# Altium PCB MSXIV_DC-DC_Converter.PcbDoc (part 1 of 2)
Units mm, origin at the board's own origin, x right, y up, seen from the top; angles counter-clockwise.
Board outline 196.53 x 66.51 mm, 2 copper layers (Top Layer, Bottom Layer); 69 components, 35 nets, 204 pads, 127 vias.
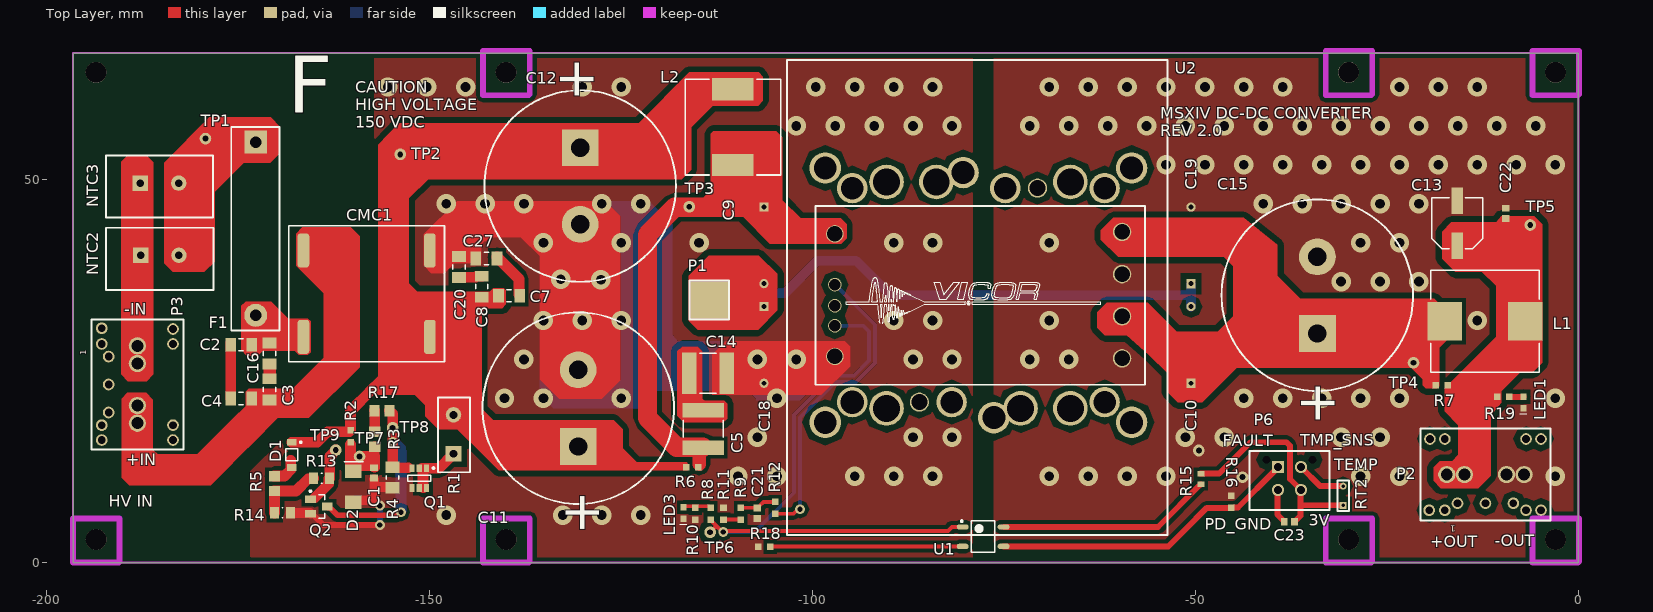
[diagram p0: Top Layer view]
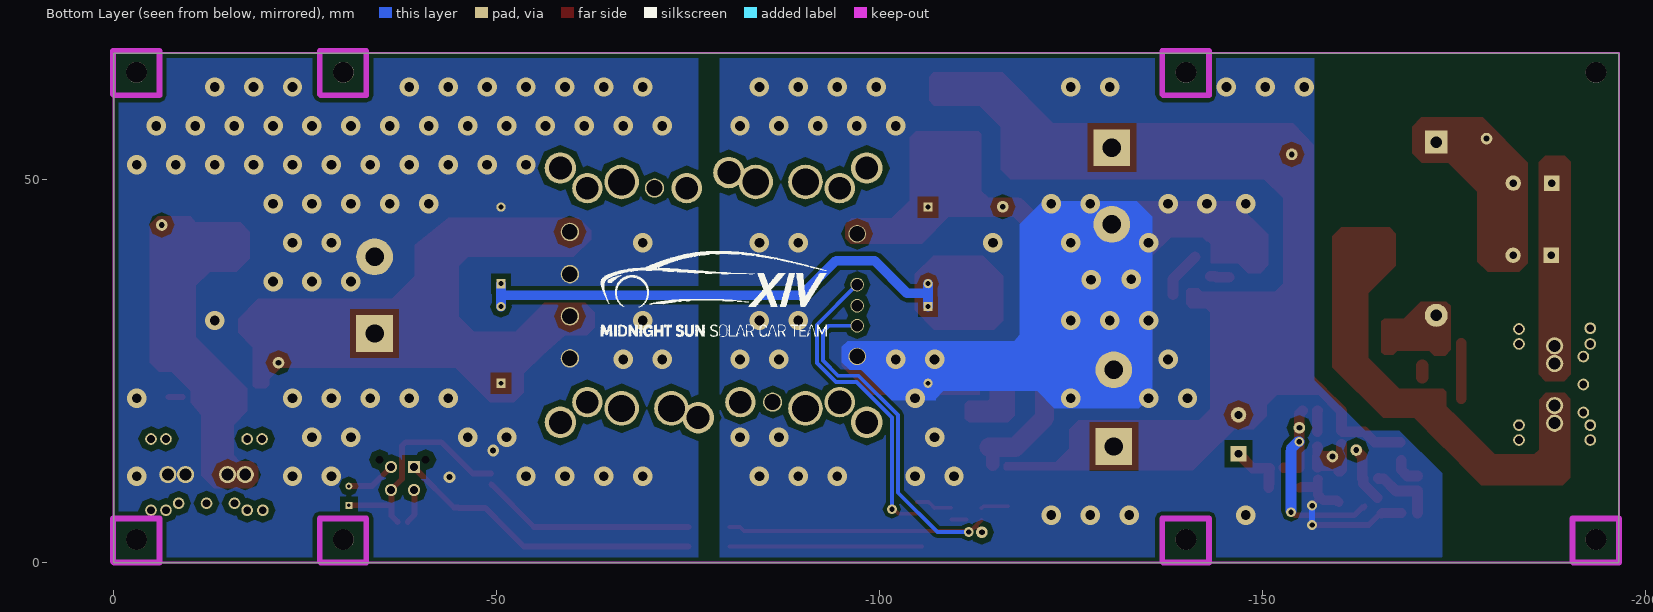
[diagram p1: Bottom Layer view, seen from below]
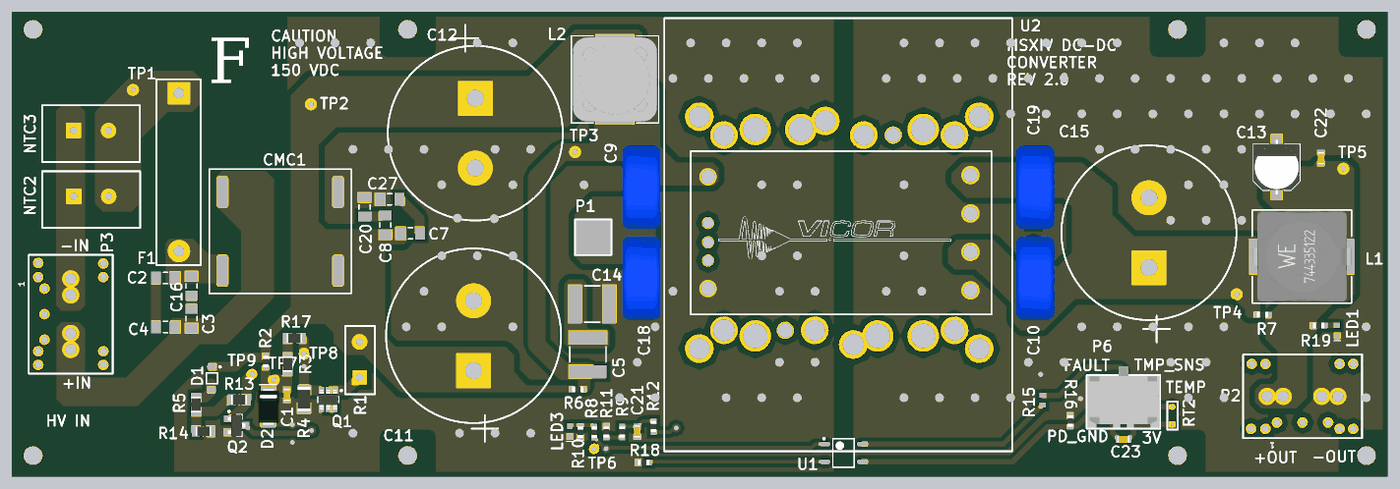
[diagram p2: 3D render of the assembled board from above, using the file's embedded part models]

## Layer stack, top to bottom
Top Solder: solder mask 0.0102, Solder Resist, Dk 3.5
Top Layer: signal copper 0.0356
Dielectric 1: dielectric 0.32, FR-4, Dk 4.8
Bottom Layer: signal copper 0.0356
Bottom Solder: solder mask 0.0102, Solder Resist, Dk 3.5

## Board outline
-196.53,0 -196.53,66.508 0,66.508 0,0

## Design rules (kind name [scope] priority, off if disabled: settings)
Clearance "Stitching HV_GND" [IsStitchingVia and InNet('HV_GND') vs (IsVia and (Not IsStitchingVia)) Or IsPad] p1: gap=0.127 ignorepadtopadclearanceinfootprint=FALSE
Clearance [All] p2: gap=0.254 ignorepadtopadclearanceinfootprint=FALSE except(0: Arc-Hole Track-Hole SMDPad-SMDPad SMDPad-THPad SMDPad-Hole THPad-Hole Via-Hole Fill-Hole Poly-Hole Region-Hole Text-Hole; 0.508: Arc-Fill Arc-Poly Arc-Region Track-Fill Track-Poly Track-Region SMDPad-Fill SMDPad-Poly SMDPad-Region Via-Fill Via-Poly Via-Region; 0.762: THPad-Fill THPad-Poly THPad-Region Fill-Fill Fill-Poly Fill-Region Poly-Poly Poly-Region Region-Region)
Height [All] p1: minheight=0 maxheight=50 prefheight=12.7
PolygonConnect [All] p1: connectstyle=Direct reliefconductorwidth=0.254 reliefentries=4 polygonreliefangle="90 Angle" airgapwidth=0.254
RoutingVias [All] p1: holewidth=0.711 width=1.27 viastyle="Through Hole" minholewidth=0.711 minwidth=1.27 maxholewidth=0.711 maxwidth=1.27
SolderMaskExpansion [All] p1: expansion=0.102 istentingtop=FALSE
Width [All] p1: maxlimit=2.54 minlimit=0.254 preferedwidth=0.254 minimp=50.000000 maximp=50.000000 favimp=50.000000
29 further rules are at their usual default settings.

## Classes and differential pairs
component class MSXIV_Discharge_Circuit: C1 D1 D2 Q1 Q2 R1 R2 R3 R4 R5 R13 R14 R17 TP7 TP8 TP9
net class HV: BULK_CAP_NEG BULK_CAP_POS HV_POS NetC5_1
net class 20A: GND NetC10_1 NetC13_1
net class 5A: BULK_CAP_NEG BULK_CAP_POS HV_POS NetC5_1
component class MSXIV_DC-DC_Converter: C2 C3 C4 C5 C7 C8 C9 C10 C11 C12 C13 C14 C15 C16 C18 C19 C20 C21 C22 C23 C27 CMC1 F1 F2 L1 L2 LED1 LED3 NTC2 NTC3 P1 P2 P3 P6 R6 R7 R8 R9 R10 R11 R12 R15 R16 R18 R19 RT2 TP1 TP2 TP3 TP4 TP5 TP6 U1 U2

## Components (designator, comment, footprint, x,y, rotation, side; value= is the part's Value field where it differs from the comment)
C1 "CAP CER 1UF 50V 10% X7R 0603" "CAP, 0603" -157.251,11.695 r270 top value=1µF
C2 "CAP CER 0.1UF 200V X7R 1206" "CAP, 1206" -174.587,28.427 r180 top
C3 "CAP CER 0.1UF 200V X7R 1206" "CAP, 1206" -170.876,22.61 r270 top
C4 "CAP CER 0.1UF 200V X7R 1206" "CAP, 1206" -174.584,21.417 r0 top
C5 "CAP CER 1UF 200V X7R 2220" "CAP, 2220" -114.249,17.45 r90 top
C7 "CAP CER 0.1UF 200V X7R 1206" "CAP, 1206" -139.608,34.828 r0 top
C8 "CAP CER 0.1UF 200V X7R 1206" "CAP, 1206" -143.19,36.018 r90 top
C9 "CAP CER 4700PF 400VAC Y5V RADIAL" "CAP 4700PF 400VAC Y5V RADIAL" -106.333,46.408 r270 top value=4700pF
C10 "CAP CER 4700PF 400VAC Y5V RADIAL" "CAP 4700PF 400VAC Y5V RADIAL" -50.583,23.408 r90 top value=4700pF
C11 "CAP ALUM 1000UF 20% 200V SNAP" "CAP ALUM 1000uF 200V" -130.583,15.158 r90 top locked
C12 "CAP ALUM 1000UF 20% 200V SNAP" "CAP ALUM 1000uF 200V" -130.333,54.158 r270 top locked
C13 "EEE-1HA4R7NP" "CAP ALUM 6.3MM RADIAL SMD" -15.824,44.298 r90 top
C14 "CAP CER 1UF 200V X7R 2220" "CAP, 2220" -113.633,24.708 r0 top
C15 "CAP ALUM 15000UF 20% 25V SNAP" "CAP ALUM 1000uF 200V" -34.083,29.908 r90 top
C16 "CAP CER 0.1UF 200V X7R 1206" "CAP, 1206" -170.876,27.284 r270 top
C18 "CAP CER 4700PF 400VAC Y5V RADIAL" "CAP 4700PF 400VAC Y5V RADIAL" -106.333,33.408 r270 top value=4700pF
C19 "CAP CER 4700PF 400VAC Y5V RADIAL" "CAP 4700PF 400VAC Y5V RADIAL" -50.583,36.408 r90 top value=4700pF
C20 "CAP CER 0.1UF 200V X7R 1206" "CAP, 1206" -146.152,38.583 r90 top
C21 "CAP CER 0.1UF 50V 10% X7R 0603" "CAP, 0603" -107.188,6.452 r270 top
C22 "CAP CER 10uF 25V 20% X5R 0603" "CAP, 0603" -9.5,45.578 r90 top
C23 "CAP CER 0.1UF 50V 10% X7R 0603" "CAP, 0603" -37.729,5.313 r180 top
C27 "CAP CER 0.1UF 200V X7R 1206" "CAP, 1206" -142.57,39.7 r180 top
CMC1 "CM Choke" "LCCI 50 Common mode choke" -158.201,35.107 r0 top
D1 "DIODE ZENER 68V 500MW SOD123" ONSC-SOD-123-2-425-04_V -167.97,14.072 r270 top
D2 "DIODE ZENER 16V 5W DO-214AA (SMB)_1" "DO-214AA Diode" -159.944,7.874 r90 top
F1 "FUSE CERAMIC 5A 600VAC/500VDC" 0ADKC5000-BE-Footprint-1 -172.898,32.741 r0 top
L1 "FIXED IND 820NH 27A 0.9 MOHM SMD" WE-HCI-1365 -12.21,31.496 r0 top
L2 "FIXED IND 22UH 5.3A 28 MOHM SMD" WE-PD-XXL -110.388,56.845 r270 top
LED1 "LED GREEN CLEAR 2V 0603" LED_0603 -7.188,21.59 r270 top
LED3 "LED RED CLEAR 2V 0603" LED_0603 -116.85,7.165 r270 top
NTC2 "ICL 80 OHM 20% 1.6A" ICL_THROUGH_HOLE_B57236S0800M051 -187.716,40.111 r0 top
NTC3 "ICL 80 OHM 20% 1.6A" ICL_THROUGH_HOLE_B57236S0800M051 -187.741,49.534 r0 top
P1 "5mm PAD" "5MM PAD" -113.483,34.208 r0 top
P2 "CONN HEADER TE  ELCON Mini 2POS PCB" "CONN HEADER TE  ELCON Mini 2POS PCB-Footprint-1" -12.141,11.481 r270 top
P3 "CONN HEADER TE  ELCON Mini 2POS PCB" "CONN HEADER TE  ELCON Mini 2POS PCB-Footprint-1" -188.138,23.241 r180 top
P6 "CONN 4POS MICRO-FIT 3mm" "CONN 4POS MICROFIT (2x2)" -36.227,9.476 r0 top
Q1 "MOSFET N-CH 200V 1.1A SSOT-6" FAIR-SOT23-6_V -151.333,11.024 r270 top
Q2 "MMBT3904" FAIR-SOT23-3_V -164.44,7.315 r0 top
R1 "RES 1K OHM 15W 1% TO126" MP915-1.00K-1%-Footprint-1 -146.863,14.199 r90 top
R2 "RES 1M OHM 1% 1/10W 0603" "RES, 0603" -160.299,16.472 r270 top
R3 "Resistor 100k +/-1% 0805 125 mW" RESC2013X70X40ML20T20 -157.15,16.094 r270 top value=100k
R4 "RES SMD 470K OHM 0.1% 1/4W 1206" "RES 1206" -154.813,11.1 r270 top value=470k
R5 "Resistor 100k +/-1% 0805 125 mW" RESC2013X70X40ML20T20 -170.256,10.312 r90 top value=100k
R6 "RES 1 OHM 5% 1/10W 0603" "RES, 0603" -115.685,12.471 r0 top
R7 "RES 1 OHM 5% 1/10W 0603" "RES, 0603" -17.833,23.158 r0 top
R8 "RES 330 OHM 1% 1/10W 0603" "RES, 0603" -113.311,6.352 r90 top
R9 "RES 10K OHM 1% 1/10W 0603" "RES, 0603" -109.366,6.377 r270 top
R10 "RES 54.9K OHM 1% 1/10W 0603" "RES, 0603" -115.311,6.352 r270 top
R11 "RES 15.6K OHM 0.1% 1/10W 0402" "RES, 0603" -111.616,6.377 r270 top
R12 "RES 0.0 OHM 1/4W 0603" "RES, 0603" -104.866,7.152 r270 top
R13 "Resistor 10k +/-1% 0805 125 mW" RESC2013X50X35ML15T15 -164.084,10.998 r180 top value=10k
R14 "Resistor 10k +/-1% 0805 125 mW" RESC2013X50X35ML15T15 -169.181,6.477 r180 top value=10k
R15 "RES SMD 100 OHM 1% 1/10W 0603" RESC1608X55X25NL10T15 -49.301,10.908 r90 top
R16 "RES 1K OHM 5% 1/10W 0603" "RES, 0603" -45.339,7.937 r90 top
R17 "Resistor 100k +/-1% 0805 125 mW" RESC2013X70X40ML20T20 -156.194,19.812 r180 top value=100k
R18 "RES 330 OHM 1% 1/10W 0603" "RES, 0603" -106.299,2.032 r180 top
R19 "RES 4.7K OHM 1% 1/10W 0603" "RES, 0603" -9.817,21.615 r0 top
RT2 "10K NTC" "NTC THERMISTOR BEAD" -30.718,7.472 r90 top
TP1 "Thru Test Point" "Thru Test Point" -179.248,55.347 r0 top
TP2 "Thru Test Point" "Thru Test Point" -153.822,53.289 r90 top
TP3 "Thru Test Point" "Thru Test Point" -116.078,46.457 r90 top
TP4 "Thru Test Point" "Thru Test Point" -21.539,26.086 r90 top
TP5 "Thru Test Point" "Thru Test Point" -6.299,44.069 r90 top
TP6 "Thru Test Point" "Thru Test Point" -113.36,3.962 r90 top
TP7 "Thru Test Point" "Thru Test Point" -159.131,13.843 r90 top
TP8 "Thru Test Point" "Thru Test Point" -154.813,17.588 r90 top
TP9 "Thru Test Point" "Thru Test Point" -162.23,14.681 r90 top
U1 "OPTOISOLATOR 1.5KV TRANS 4SMD" SOIC127P610X228-4N -77.724,3.378 r0 top
U2 "DCDC VICOR CONVERTER 15V 240W - DCM3623TA5N17B4T70" "IC, DCDC CONVERTER DCM3623TA5N17B4T70" -78.333,34.908 r0 top locked

## Footprints (in the part's own frame and the unit in brackets; to place one, negate y for a bottom-side part, rotate by r counter-clockwise, add the part's x,y. Pads: shape width x height; smd on the part's side, far side on the other; paste and mask are expansions set on the pad)
0ADKC5000-BE-Footprint-1 [mm]
  rect 3x3 hole 1.5: 1(0.217,22.135)
  round 3 hole 1.5: 2(0.217,-0.465)
  silkscreen extent -2.98,-2.46 3.32,24.14, body extent -2.98,-2.46 3.32,24.14, height 8.13
"5MM PAD" [mm] "5mmx5mm Pad for EMI GROUND"
  rect 5x5 smd: 1(0,0)
  silkscreen extent -2.6,-2.5 2.6,2.6
"CAP 4700PF 400VAC Y5V RADIAL" [mm] "4700pF ±20% 400VAC Ceramic Capacitor Y5V (F) Radial, Disc"
  rect 1.2x1.2 hole 0.65: 1(0,0)
  round 1.2 hole 0.65: 2(10,0)
  body extent -1,-3 11,2.5, height 16
"CAP ALUM 6.3MM RADIAL SMD" [mm] "Aluminum Electrolytic Capacitor, Body 6.50x6.50x5.50mm, IPC Low Density"
  rect 3.45x1.55 smd: 1(-2.95,0) 2(2.95,0)
  silkscreen extent -3.3,-3.3 3.3,3.3, body extent -3.9,-3.3 3.9,3.3, height 5.5
"CAP ALUM 1000uF 200V" [mm] "Footprint for 1000µF 200V Aluminum Electrolytic Capacitors Radial, Can - Snap-In 199mOhm @ 120Hz 3000 Hrs @ 85°C"
  rect 4.8x4.8 hole 2.4: 1(0,0)
  round 4.8 hole 2.4: 2(10,0)
  silkscreen extent -7.5,-12.5 17.5,12.5, body extent -8,-12.99 18,13, height 45
"CAP, 0603" [mm] "Chip Capacitor, 2-Leads, Body 1.60x0.81mm, IPC Medium Density"
  rect 0.9x1 smd mask+0.076: 1(-0.675,0) 2(0.675,0)
  body extent -0.87,-0.48 0.87,0.48, height 0.9
"CAP, 1206" [mm] "Chip Capacitor, 2-Leads, Body 3.20x1.60mm, IPC Medium Density"
  rect 1.4x1.8 smd: 1(-1.375,0) 2(1.375,0)
  silkscreen extent -0.3,-0.8 0.3,0.8, body extent -1.68,-0.87 1.67,0.87, height 1.8
"CAP, 2220" [mm] "Chip Capacitor, 2-Leads, Body 5.70x5.00mm, IPC Medium Density"
  rect 1.9x5.4 smd: 1(-2.45,0) 2(2.45,0)
  silkscreen extent -1.1,-2.6 1.1,2.6, body extent -3.05,-2.7 3.05,2.7, height 2.3
"CONN 4POS MICROFIT (2x2)" [mm]
  round 1.6 hole 1.02: 1(0,0) 2(-3,0) 3(0,3)
  rect 1.6x1.6 hole 1.02: 4(-3,3)
  round 0 hole 1.02: ""(-4.5,3.94) ""(1.5,3.94)
  silkscreen extent -6.75,-2.63 3.75,5.06, body extent -6.57,-2.47 3.57,6.29, height 9.91
"CONN HEADER TE  ELCON Mini 2POS PCB-Footprint-1" [mm]
  round 1.524 hole 1: 0(-4.65,7.25) 0(-4.65,5.3) 0(-4.65,-5.3) 0(-4.65,-7.25) 0(3.75,3.65) 0(3.75,0) 0(3.75,-3.65) 0(4.65,7.25) 0(4.65,5.3) 0(4.65,-5.3) 0(4.65,-7.35)
  round 2.25 hole 1.56: 1(0,-2.75) 1(0,-5.05) 2(0,5.05) 2(0,2.75)
  silkscreen extent -6,-8.5 6,8.5
"DO-214AA Diode" [mil] "Zener Diode 16V 5W SMBJ5353B-TP"
  rect 70x85 smd: 1(0,0) 2(160,0)
  silkscreen extent 209,-50 209,47, body extent -21,-60 187,55, height 95
FAIR-SOT23-3_V [mm] "SOT23, 3-Leads, Body 3.12x1.5mm, Pitch 0.95mm"
  rect 1.4x1 smd: 1(-1.1,0.95) 2(-1.1,-0.95) 3(1.1,0)
  silkscreen extent -1.22,-1.55 0.75,2.12, body extent -1.35,-1.56 1.35,1.56, height 1.2
FAIR-SOT23-6_V [mm] "SOT23, 6-Leads, Body 2.9x1.6mm, Pitch 0.95mm"
  rect 1x0.7 smd: 1(-1.3,0.95) 2(-1.3,0) 3(-1.3,-0.95) 4(1.3,-0.95) 5(1.3,0) 6(1.3,0.95)
  silkscreen extent -1.42,-1.5 0.4,1.98, body extent -1.4,-1.45 1.4,1.45, height 1.45
"IC, DCDC CONVERTER DCM3623TA5N17B4T70" [mm]
  round 2.28 hole 2.03: A1(-18.75,8) E1(-18.75,-8)
  round 2.41 hole 2.03: A'2(18.75,8.25) B'2(18.75,2.75) C'2(18.75,-2.75) D'2(18.75,-8.25)
  round 1.77 hole 1.52: B1(-18.75,1.38) C1(-18.75,-1.38) D1(-18.75,-4)
  round 4.1 hole 3: ""(-20,-16.6) ""(-20,16.6) ""(-2,16) ""(2,-16) ""(20,-16.6) ""(20,16.6)
  round 2.5 hole 3.1 unplated: ""(-16.47,-13.97)
  round 3.97 hole 2.95: ""(-16.47,-13.97) ""(-16.47,13.97) ""(-3.5,-13.97) ""(3.5,13.97) ""(16.47,-13.97) ""(16.47,13.97)
  round 4.52 hole 3.5: ""(-12,-14.78) ""(-12,14.78) ""(-12,14.78) ""(-5.5,14.78) ""(5.5,-14.78) ""(12,-14.78) ""(12,14.78)
  round 2.5 hole 2.1: ""(-7.71,-13.97) ""(7.71,13.97)
  silkscreen extent -25,-31.3 24.7,30.7, body extent -21.25,-11.7 21.75,11.64, height 8
ICL_THROUGH_HOLE_B57236S0800M051 [mm]
  rect 2x2 hole 1: 1(0,0)
  round 2 hole 1: 2(5,0)
  silkscreen extent -4.5,-4.5 9.5,3.6
"LCCI 50 Common mode choke" [mil] "5.6A CMC 18mm x20mm x 10mm"
  rrect50% 60x175 smd: 1(-325,-222) 2(325,-222) 3(-325,222) 4(325,222)
  silkscreen extent -400,-350 400,350, body extent -400,-350 400,350, height 390
LED_0603 [mm]
  rect 0.8x0.8 smd: 1(-0.05,0.01) 2(1.45,0.01)
  silkscreen extent 2.13,-0.46 2.13,0.45, body extent -0.09,-0.39 1.51,0.41, height 0.8
MP915-1.00K-1%-Footprint-1 [mil]
  rect 80x80 hole 40: 1(0,0)
  round 80 hole 40: 2(200,0)
  silkscreen extent -95,-85 290,80, body extent -95,-85 290,80, height 800
"NTC THERMISTOR BEAD" [mm] "NTC Thermistor 10k Bead"
  rect 0.9x0.9 hole 0.45: 1(0,0)
  round 0.9 hole 0.45: 2(2.5,0)
  silkscreen extent -0.75,-0.75 3.25,0.75
ONSC-SOD-123-2-425-04_V [mm] "SOD, 2-Leads, Body 2.69x1.6mm"
  rect 0.91x1.22 smd: 1(-1.635,0) 2(1.635,0)
  silkscreen extent -1.76,-0.8 0.78,1.29, body extent -1.35,-0.8 1.35,0.8, height 1.35
"RES 1206" [mm] "Chip Resistor, 2-Leads, Body 3.20x1.60mm, IPC Medium Density"
  rect 1.5x1.85 smd: 1(-1.325,0) 2(1.325,0)
  silkscreen extent -0.2,-0.82 0.2,0.82, body extent -1.73,-0.92 1.73,0.92, height 0.64
"RES, 0603" [mm] "Chip Resistor, 2-Leads, Body 1.60x0.80mm, IPC Medium Density"
  rect 0.85x0.85 smd: 1(-0.775,0) 2(0.775,0)
  body extent -0.8,-0.4 0.8,0.4, height 0.55
RESC1608X55X25NL10T15 [mm] "Chip Resistor, 2-Leads, Body 1.70x0.90mm, IPC Medium Density"
  rect 0.7x0.9 smd: 1(-0.7,0) 2(0.7,0)
  body extent -0.85,-0.45 0.85,0.45, height 0.55
RESC2013X50X35ML15T15 [mm] "Chip Resistor, 2-Leads, Body 2.2x1.4mm, IPC Low Density"
  rect 1.2x1.5 smd: 1(-1.05,0) 2(1.05,0)
  silkscreen extent -0.05,-0.65 0.05,0.65, body extent -1.1,-0.7 1.1,0.7, height 0.5
RESC2013X70X40ML20T20 [mm] "Chip Resistor, 2-Leads, Body 2.2x1.35mm, IPC Low Density"
  rect 1.35x1.45 smd: 1(-0.975,0) 2(0.975,0)
  body extent -1.1,-0.67 1.1,0.67, height 0.7
SOIC127P610X228-4N [mm] "SOIC, 4-Leads, Body 4.08x3.81mm, Pitch 1.27mm, IPC Medium Density"
  oval 1.55x0.7 smd: 1(-2.667,1.27) 2(-2.667,-1.27) 3(2.667,-1.27) 4(2.667,1.27)
  silkscreen extent -2.92,-2.05 1.53,2.16, body extent -1.9,-2.05 1.9,2.05, height 2.28
"Thru Test Point" [mil]
  round 60 hole 30: TH_TP(0,0)
WE-HCI-1365 [mm] "Inductor, 2-Leads, Body 13.2 x 12.8 mm"
  rect 4.5x5 smd: 1(-5.25,0) 2(5.25,0)
  silkscreen extent -7.1,-6.65 7.1,6.65, body extent -7.1,-6.4 7.1,6.4, height 6.49
WE-PD-XXL [mm] "SMD Inductor, 2-Leads, Body 12.0 x 12.0 mm"
  rect 2.9x5.4 smd: 1(-4.95,0) 2(4.95,0)
  silkscreen extent -6.25,-6.25 6.25,6.25, body extent -6,-6 6,6, height 10.36

## Part data
C1: library part CMP-013-0013-1, "1µF ±10% 50V Ceramic Capacitor X7R 0603 (1608 Metric)", Manufacturer 1="Taiyo Yuden", Manufacturer Part Number 1=UMK107AB7105KA-T, Operating Temperature="-55°C ~ 125°C", Package / Case="0603 (1608 Metric)", Ratings=-, Temperature Coefficient=X7R, Tolerance=10%, Voltage=50V, ComponentLink1Description=http://www.yuden.co.jp/productdata/catalog/en/mlcc_all_e.pdf, ComponentLink1URL=http://www.yuden.co.jp/productdata/catalog/en/mlcc_all_e.pdf, Design Item ID="CAP CER 1UF 50V 10% X7R 0603", Height - Seated (Max)=-, Lead Spacing=-, Lead Style=-, Mounting Type="Surface Mount, MLCC", Packaging="Cut Tape (CT)", Part Status=Active, Size / Dimension="0.063\" L x 0.031\" W (1.60mm x 0.80mm)", Source="Schematic Diagrams.SchLib", Thickness (Max)="0.037\" (0.95mm)"
C2 C3 C4 C7 C8 C16 C20 C27: Capacitance=0.1µF, Manufacturer 1=Manufacturer, Manufacturer Part Number 1=885342208002, Package / Case="1206 (3216 Metric)", Supplier Part Number 1=732-12081-1-ND, Temperature Coefficient=X7R, Tolerance=±10%, Voltage - Rated=200V, Supplier 1=Digi-Key
C5 C14: "1µF ±10% 200V Ceramic Capacitor X7R 2220 (5750 Metric)", Capacitance=1µF, Manufacturer="Murata Electronics", Manufacturer Part Number 1=GRM55DR72D105KW01L, Package / Case="2220 (5750 Metric)", Supplier Part Number 1=490-14683-1-ND, Temperature Coefficient=X7R, Tolerance=±10%, Voltage - Rated=200V, Mounting Type 1="Surface Mount, MLCC", Size / Dimension="0.224\" L x 0.197\" W (5.70mm x 5.00mm)", Supplier 1=Digi-Key
C9 C10 C18 C19: "4700pF ±20% 400VAC Ceramic Capacitor Y5V (F) Radial, Disc", Manufacturer=KEMET, Manufacturer Part Number=C951U472MVVDBA7317, Operating Temperature="-40°C ~ 125°C", Package / Case="Radial, Disc", Ratings="X1, Y1", Supplier Part Number 1=399-9517-1-ND, Temperature Coefficient="Y5V (F)", Tolerance=±20%, Voltage - Rated=400VAC, Applications=Safety, Category=Capacitors, ComponentLink1Description=https://search.kemet.com/component-edge/download/datasheet/C951U472MVVDBA7317.pdf, ComponentLink1URL=https://search.kemet.com/component-edge/download/datasheet/C951U472MVVDBA7317.pdf, Failure Rate=-, Features=-, Height - Seated (Max)=-, Lead Spacing="0.394\" (10.00mm)", Lead Style="Formed Leads - Kinked", Mounting Type="Through Hole", Packaging="Cut Tape (CT)", Part Status=Active, Pricing 1="1=1.12, 10=0.795, 100=0.5234, 500=0.38772 (CAD)", RoHS="RoHS Compliant", Size / Dimension="0.472\" Dia (12.00mm)", Stock 1=9713, Supplier 1=Digi-Key, Thickness (Max)=-
C11 C12: "CAP RADIAL ALUM 1000UF 20% 200V SNAP", Capacitance=1000µF, ESR (Equivalent Series Resistance)="199mOhm @ 120Hz", Manufacturer 1="Cornell Dubilier Electronics (CDE)", Manufacturer Part Number 1=SLPX102M200C4P3, Package / Case="Radial, Can - Snap-In", Supplier Part Number 1=338-1557-ND, Tolerance=±20%, Voltage - Rated=200V, Mounting Type="Through Hole", Polarization=Polar, Supplier 1=Digi-Key
C13: library part "CAP ALUM 4.7UF 20% 50V SMD", "4.7µF 50V Aluminum Electrolytic Capacitors Radial, Can - SMD 2000 Hrs @ 85°C", Capacitance=4.7uF, Case/Package=Radial, Manufacturer 1=Panasonic, Max Operating Temperature=85°C, Min Operating Temperature=-40°C, Package Quantity=1, Ripple Current=31mA, Supplier Part Number 1=PCE4304CT-ND, Tolerance=20%, Voltage Rating=50V, ComponentLink1Description=https://datasheet.ciiva.com/46374/aba0000ce2-46374373.pdf, ComponentLink1URL=https://datasheet.ciiva.com/46374/aba0000ce2-46374373.pdf, ComponentLink2Description=https://datasheet.ciiva.com/14600/70255710-14600343.pdf, ComponentLink2URL=https://datasheet.ciiva.com/14600/70255710-14600343.pdf, ComponentLink3Description=https://datasheet.ciiva.com/17536/aba0000ce2-17536647.pdf, ComponentLink3URL=https://datasheet.ciiva.com/17536/aba0000ce2-17536647.pdf, ComponentLink4Description=https://datasheet.ciiva.com/24027/aba0000ce2-40801-24027083.pdf, ComponentLink4URL=https://datasheet.ciiva.com/24027/aba0000ce2-40801-24027083.pdf, ComponentLink5Description=https://datasheet.ciiva.com/31414/aba0000ce2-31414684.pdf, ComponentLink5URL=https://datasheet.ciiva.com/31414/aba0000ce2-31414684.pdf, ComponentLink6Description=https://datasheet.ciiva.com/14606/70255710-14606079.pdf, ComponentLink6URL=https://datasheet.ciiva.com/14606/70255710-14606079.pdf, Description 1="CAPACITOR ALUM ELEC, 4.7UF, 50V, 20%, SMD", Diameter=6.3mm, Height=5.4mm, Height - Seated (Max)=0.213inch, Lead Free="Lead Free", Length=5.5mm, Life (Hours)=2000Hour, Manufacturer Part Number 1=EEE-1HA4R7NP, Mount="Surface Mount,PCB", Packaging="Tape and Reel", Pricing 1="1=0.43, 10=0.302, 100=0.1986, 500=0.1471 (USD)", Radiation Hardening=No, REACH SVHC="No SVHC", Ripple Current (AC)=31mA, Stock 1=19771, Supplier 1=Digi-Key, Termination=SMD/SMT, Voltage Rating (DC)=50V, Width=650um
C15: "15000µF 25V Aluminum Electrolytic Capacitors Radial, Can - Snap-In 40mOhm 3000 Hrs @ 105°C", Capacitance=15000µF, Manufacturer="Cornell Dubilier Electronics (CDE)", Manufacturer Part Number=SLP153M025C4P3, Supplier Part Number 1=338-1470-ND, Tolerance=±20%, Voltage - Rated=25V, Parameter 1="0.984\" Dia (25.00mm)", Size / Dimension="0.984\" Dia (25.00mm)", Supplier 1=Digi-Key
C21 C23: "0.10µF ±10% 50V Ceramic Capacitor X7R 0603 (1608 Metric)", Capacitance=0.1µF, Manufacturer 1="AVX Corporation", Manufacturer Part Number 1=06035C104KAT2A, Operating Temperature="-55°C ~ 125°C", Package / Case="0603 (1608 Metric)", Ratings=-, Supplier Part Number 1=478-5052-1-ND, Temperature Coefficient=X7R, Tolerance=±10%, Voltage=50V, ComponentLink1Description=http://datasheets.avx.com/X7RDielectric.pdf, ComponentLink1URL=http://datasheets.avx.com/X7RDielectric.pdf, Height - Seated (Max)=-, Lead Spacing=-, Lead Style=-, Mounting Type="Surface Mount, MLCC", Packaging="Cut Tape (CT)", Part Status=Active, Size / Dimension="0.063\" L x 0.032\" W (1.60mm x 0.81mm)", Supplier 1=Digi-Key, Thickness (Max)="0.035\" (0.90mm)"
C22: "10µF ±20% 25V Ceramic Capacitor X5R 0603 (1608 Metric)", Capacitance=10µF, Manufacturer 1="Murata Electronics North America", Manufacturer Part Number 1=GRM188R61E106MA73D, Operating Temperature="-55°C ~ 85°C", Package / Case="0603 (1608 Metric)", Ratings=-, Supplier Part Number 1=490-7202-1-ND, Temperature Coefficient=X5R, Tolerance=±20%, Voltage=25V, ComponentLink1Description=http://www.murata.com/~/media/webrenewal/support/library/catalog/products/capacitor/mlcc/c02e.ashx, ComponentLink1URL=http://www.murata.com/~/media/webrenewal/support/library/catalog/products/capacitor/mlcc/c02e.ashx, Height - Seated (Max)=-, Lead Spacing=-, Lead Style=-, Mounting Type="Surface Mount, MLCC", Packaging="Cut Tape (CT)", Part Status=Active, Size / Dimension="0.063\" L x 0.031\" W (1.60mm x 0.80mm)", Supplier 1=Digi-Key, Thickness (Max)="0.031\" (0.80mm)"
CMC1: library part "COMMON MODE CHOKE 5.6A 2LN SMD", "2 Line Common Mode Choke Surface Mount  5.6A DCR 21mOhm", Current Rating (Max)=5.6A, DC Resistance (DCR) (Max)=21mOhm, Manufacturer 1="Pulse Electronics Power", Manufacturer Part Number 1=P0353NLT, Package=TBD, PartNumber=P0353NL, Supplier Part Number 1=553-1764-1-ND, Filter Type="Power Line", Number of Lines=2, Supplier 1=Digi-Key
D1: library part CMP-004-00031-1, "Diode Zener Single 68V 5% 500mW Automotive 2-Pin SOD-123 T/R", Case/Package=SOD-123-2, Max Operating Temperature=150°C, Max Power Dissipation=500mW, Max Reverse Leakage Current=100nA, Min Operating Temperature=-55°C, Package Quantity=3000, Tolerance=5%, Zener Voltage=68V, Element Configuration=Single, Impedance=230R, Lead Free="Lead Free", Number of Pins=2, Packaging="Tape and Reel", Radiation Hardening=No, Voltage Tolerance=5%
D2: library part CMP-014-0016-1, "Zener Diode 16V 5W ±5% Surface Mount DO-214AA (SMB)", Manufacture="Micro Commercial Co", Manufacture Part Number=SMBJ5353B-TP, Power (Max)=5W, Voltage - Forward="1.2V @ 1A", Voltage - Zener (Nom)=16V, Design Item ID="DIODE ZENER 16V 5W DO-214AA (SMB)_1", Impedence (Max)="2.5 Ohm", Source="Schematic Diagrams.SchLib"
F1: library part CMP-005-00013-1, "FUSE CERAMIC 5A 600VAC/500VDC FOOTPRINT IS FOR 5x20mm HOLDER", Current Rating=5A, Max Operating Temperature=125°C, Min Operating Temperature=-55°C, Voltage Rating (AC)=600V, Voltage Rating (DC)=500V, Approvals=cURus, Fuse Type="Cartridge, Ceramic", Mount=Holder, Packaging=Bulk
L1: library part CMP-006-00021-1, "WURTH ELEKTRONIK         744355182             Surface Mount Power Inductor, WE-HCI Series, 820 nH, 27 A, 35 A, Shielded, 9000 ohm", Case/Package=1365, Current Rating=27A, DC Resistance (DCR)=0.9mR, Inductance=820nH, Inductance Tolerance=20%, Max Operating Temperature=155°C, Min Operating Temperature=-40°C, Package Quantity=400, Saturation Current=35A, Self Resonant Frequency=72MHz, Series Resistance=900mR, Test Frequency=100kHz, Composition=Wirewound, Depth=13.3mm, Height=6.2mm, Height - Seated (Max)=0.197inch, Length=13.2mm, Max DC Current=27A, Military Standard=Not, Mount="Surface Mount", Number of Pins=2, Packaging="Tape and Reel", REACH SVHC=Unknown, RMS Current (Irms)=27A, Shielding=Shielded, Termination=SMD/SMT, Tolerance=20%, Width=12.8mm
L2: library part CMP-006-00023-1, "Inductor, SMD 22 uH 5.3 A ±20%, 7447709220, Würth Elektronik", Case Code (Imperial)=1210, Case Code (Metric)=3225, Case/Package=Nonstandard, Current Rating=5.3A, DC Resistance (DCR)=28mR, Inductance=22uH, Inductance Tolerance=20%, Max Operating Temperature=125°C, Min Operating Temperature=-40°C, Package Quantity=250, Saturation Current=6.5A, Self Resonant Frequency=10MHz, Test Frequency=1kHz, Composition=Wirewound, Core Material=Ferrite, DC Current=5.3A, Depth=12.5mm, Height=10mm, Height - Seated (Max)=0.394inch, Lead Pitch=7mm, Length=12mm, Max DC Current=5.3A, Military Standard=Not, Mount="Surface Mount", Number of Pins=2, Packaging="Tape and Reel", REACH SVHC=Unknown, Resistance=28mR, RMS Current (Irms)=5.3A, Series Resistance=28mR, Shielding=Shielded, Termination=SMD/SMT, Tolerance=20%, Weight=0.01lb, Width=12mm
LED1: "Green 572nm LED Indication - Discrete 2V 0603 (1608 Metric)", Color=Green, Current - Test=20mA, Lens Color=Colorless, Manufacturer="Wurth Electronics Inc.", Manufacturer Part Number=150060VS75000, Millicandela Rating=40mcd, Package / Case="0603 (1608 Metric)", Supplier Device Package=0603, Supplier Part Number 1=732-4980-1-ND, Voltage - Forward (Vf) (Typ)=2V, Category=Optoelectronics, ComponentLink1Description=http://katalog.we-online.de/led/datasheet/150060VS75000.pdf, ComponentLink1URL=http://katalog.we-online.de/led/datasheet/150060VS75000.pdf, Features=-, Height (Max)=0.80mm, Lens Style/Size="Rectangle with Flat Top, 1.10mm x 0.70mm", Lens Transparency=Clear, Mounting Type="Surface Mount", Packaging="Cut Tape (CT)", Part Status=Active, Pricing 1="1=0.21, 100=0.1617, 500=0.13964 (CAD)", RoHS="RoHS Compliant", Size / Dimension="1.60mm L x 0.80mm W", Stock 1=9408, Supplier 1=Digi-Key, Viewing Angle=140°, Wavelength - Dominant=570nm, Wavelength - Peak=572nm
LED3: library part CMP-011-0004-1, "Red 631nm LED Indication - Discrete 2V 0603 (1608 Metric)", Case/Package="0603 (1608 Metric)", Color=Red, Current - Test=20mA, Lens Color=Colorless, Manufacturer="Wurth Electronics Inc.", Manufacturer Part Number=150060RS75000, Millicandela Rating=250mcd, Supplier Device Package=0603, Voltage - Forward (Vf) (Typ)=2V, ComponentLink1Description=http://katalog.we-online.de/led/datasheet/150060RS75000.pdf, ComponentLink1URL=http://katalog.we-online.de/led/datasheet/150060RS75000.pdf, Design Item ID="LED RED CLEAR 2V 0603", Features=-, Height (Max)=0.80mm, Lens Style/Size="Rectangle with Flat Top, 1.10mm x 0.70mm", Lens Transparency=Clear, Mounting Type="Surface Mount", Packaging="Cut Tape (CT)", Part Status=Active, Pricing 1="1=0.21, 100=0.1617, 500=0.13964 (CAD)", RoHS="RoHS Compliant", Size / Dimension="1.60mm L x 0.80mm W", Source="Schematic Diagrams.SchLib", Stock 1=35521, Viewing Angle=140°, Wavelength - Dominant=625nm, Wavelength - Peak=630nm
NTC2 NTC3: "Thermistor NTC 80 Ohm 20% 2-Pin Radial 3300K Cardboard T/R", Case/Package=Radial, Manufacturer="TDK EPCOS", Manufacturer Part Number=B57236S0800M051, Max Operating Temperature=170°C, Min Operating Temperature=-55°C, Supplier Part Number 1=495-76279-1-ND, Tolerance=20%, Category="Interface ICs", ComponentLink1Description=https://datasheet.ciiva.com/26807/getdatasheetpartid-133603-26807898.pdf?src-supplier=Verical, ComponentLink1URL=https://datasheet.ciiva.com/26807/getdatasheetpartid-133603-26807898.pdf?src-supplier=Verical, Contact Plating=Tin, Depth=6mm, Diameter=11.5mm, Mount="Through Hole", Number of Pins=2, Packaging="Tape and Reel", Pricing 1="1=1.35000, 5=1.29800, 10=1.05500, 25=0.90880, 50=0.78720, 100=0.71410, 500=0.60052 (USD)", Radiation Hardening=No, RoHS=Yes, Stock 1=4719, Supplier 1=Digi-Key
P1: "5x5mm pad to solder 16 gauge wire"
P2 P3: library part CMP-002-00071-2, "CONN HEADER 2POS PCB", Contact Current Rating=40A, Current Rating=45A, Flammability Rating="UL94 V-0", Housing Color=Black, Max Operating Temperature=125°C, Min Operating Temperature=-40°C, Number of Power Positions=2, Package Quantity=150, Circuit Application=Power, Connector System=Wire-to-Board, Connector Type=Pin, Contact Gender=Male, Contact Material="Copper Alloy,Copper", Contact Plating=Silver, Contact Retention="Yes (With)", Depth=10.2mm, Gender=Male, Housing Material=Polymer, Length=18.9mm, Mount="Through Hole", Number of Contacts=2, Number of Ports=1, Number of Positions=2, Number of Rows=1, Number of Terminals=4, Orientation=Straight, Packaging="Tape and Reel", PCB Mounting Orientation=Vertical, Pitch=7.8mm, Radiation Hardening=No, REACH SVHC=Unknown, Row Spacing=7.8mm, Sealable="No (Without)", Termination="Through Hole"
P6: "Micro-Fit 3.0 Vertical Header, 3.00mm Pitch, Dual Row, 4 Circuits, with PCB Polarizing Peg, Tin, Glow-Wire Capable, Black", Color=Black, Contact Resistance=10mR, Current Rating=-, Manufacturer="Molex, LLC", Manufacturer Part Number=0430450827, Material Flammability Rating="UL94 V-0", Max Operating Temperature=105°C, Min Operating Temperature=-40°C, Package Quantity=2232, Supplier Part Number 1=WM10667-ND, Applications="General Purpose, Medical, Military, Telecommunications", Category="Connectors, Interconnects", ComponentLink1Description=https://www.molex.com/pdm_docs/sd/430450627_sd.pdf, ComponentLink1URL=https://www.molex.com/pdm_docs/sd/430450627_sd.pdf, ComponentLink2Description=https://www.molex.com/pdm_docs/sd/430450827_sd.pdf, ComponentLink2URL=https://www.molex.com/pdm_docs/sd/430450827_sd.pdf, ComponentLink3Description=http://www.molex.com/pdm_docs/sd/430450427_sd.pdf, ComponentLink3URL=http://www.molex.com/pdm_docs/sd/430450427_sd.pdf, ComponentLink4Description=http://www.molex.com/webdocs/datasheets/pdf/en-us/0430450427_PCB_HEADERS.pdf, ComponentLink4URL=http://www.molex.com/webdocs/datasheets/pdf/en-us/0430450427_PCB_HEADERS.pdf, Connector Type=Header, Contact Finish - Mating=Tin, Contact Finish - Post=Tin, Contact Finish Thickness - Mating="60.0µin (1.52µm)", Contact Finish Thickness - Post=-, Contact Length - Mating=-, Contact Length - Post="0.125\" (3.18mm)", Contact Material=Brass, Contact Plating=Tin, Contact Shape=Square, Contact Type="Male Pin", Depth=8.77mm, Fastening Type="Locking Ramp", Features="Board Guide", Housing Color=Black, Housing Material=Polymer, Ingress Protection=-, Insulation Color=Black, Insulation Height="0.390\" (9.91mm)", Insulation Material="Liquid Crystal Polymer (LCP), Glass Filled", Length=10.15mm, Mated Stacking Heights=-, Mount="Through Hole", Mounting Type="Through Hole", Number of Contacts=4, Number of Ports=1, Number of Positions=6, Number of Positions Loaded=All, Number of Rows=2, Number of Terminals=4, Operating Temperature=-, Orientation=Straight, Overall Contact Length=-, Packaging=Tray, Part Status=Active, Pitch=3mm, Pitch - Mating="0.118\" (3.00mm)", RoHS="RoHS Compliant", Row Spacing=0.118inch, Row Spacing - Mating="0.118\" (3.00mm)", Shrouding="Shrouded - 4 Wall", Style="Board to Cable/Wire", Supplier 1=Digi-Key, Termination=Solder, Voltage Rating=-
Q1: library part CMP-013-00034-1, "Trans MOSFET N-CH 200V 1.1A 6-Pin SuperSOT T/R", Case/Package=SOT-23-6, Continuous Drain Current (ID)=1.1A, Drain to Source Breakdown Voltage=200V, Drain to Source Resistance=725mR, Gate to Source Voltage (Vgs)=20V, Input Capacitance=234pF, Max Operating Temperature=150°C, Max Power Dissipation=800mW, Min Operating Temperature=-55°C, On-State Resistance=725MR, Package Quantity=1, Power Dissipation=1.6W, Threshold Voltage=4V, Contact Plating=Tin,Matte, Current Rating=1.1A, Drain to Source Voltage (Vdss)=200V, Element Configuration=Single, Fall Time=6ns, Height=1mm, Lead Free="Lead Free", Length=3mm, Mount="Surface Mount", Number of Elements=1, Number of Pins=6, Packaging="Tape and Reel", Rds On Max=725mR, REACH SVHC="No SVHC", Rise Time=6ns, Turn-Off Delay Time=17ns, Turn-On Delay Time=6ns, Voltage Rating (DC)=200V, Weight=0.036g, Width=1.7mm
Q2: library part CMP-014-00026-1, "NPN General Purpose Amplifier, 40 V, 0.2 A, -55 to 150 degC, 3-Pin SOT23, RoHS, Tape and Reel", Case/Package=TO-236-3, Frequency=300MHz, Manufacturer="Fairchild Semiconductor", Max Operating Temperature=150°C, Min Operating Temperature=-55°C, Package Description="3-Pin Small Outline Transistor, Body 2.92 x 1.325 mm, Pitch 0.95 mm", Package Quantity=3000, Package Reference=SOT23-3, Package Version="Rev. 12, 03/2016", Power=625mW, Datasheet URL=https://www.fairchildsemi.com/datasheets/MM/MMBT3904.pdf, Datasheet Version="Rev. 1.1.0, 10/2014", Elements=1, hFE Min=100, Manufacturer URL=https://www.fairchildsemi.com/, Mounting Technology=SM, Package URL=http://www.fairchildsemi.com/dwg/MA/MA03D.pdf, Packaging=TapeandReel, Pins=3, RoHS Compliant=True, Vce Max=300mV
R1: library part CMP-009-00177-1, "1 kOhms ±1% 15W Through Hole Resistor TO-126-2 Moisture Resistant, Non-Inductive Thick Film", Case/Package=TO-126, Max Operating Temperature=150°C, Max Power Dissipation=15W, Min Operating Temperature=-55°C, Package Quantity=50, Resistance=1kR, Temperature Coefficient=80ppm/°C, Tolerance=1%, Voltage Rating=200V, Composition="Thick Film", Depth=2.79mm, Features="Moisture Resistant", Height=0.45inch, Lead Diameter=0.64mm, Lead Free="Lead Free", Lead Length=11.4mm, Lead Pitch=5.08mm, Length=8.12mm, Mount="Through Hole", Number of Terminations=2, Packaging=Rail/Tube, Power Rating=15W, REACH SVHC="No SVHC", Termination=Radial, Thickness=0.01inch, Voltage Rating (DC)=200V, Width=0.11inch
R2: library part CMP-010-0007-1, "1M Ohm ±1% 0.1W, 1/10W Chip Resistor 0603 (1608 Metric) Moisture Resistant Thick Film", Manufacturer 1=Yageo, Manufacturer Part Number 1=RC0603FR-071ML, Operating Temperature="-55°C ~ 155°C", Package / Case="0603 (1608 Metric)", Power (Watts)=1/10W, Resistance (Ohms)=1M, Supplier Device Package=0603, Temperature Coefficient=±100ppm/°C, Tolerance=1%, ComponentLink1Description=http://www.yageo.com/documents/recent/PYu-RC_Group_51_RoHS_L_7.pdf, ComponentLink1URL=http://www.yageo.com/documents/recent/PYu-RC_Group_51_RoHS_L_7.pdf, Composition="Thick Film", Description 1="RES SMD 1M OHM 1% 1/10W 0603", Design Item ID="RES 1M OHM 1% 1/10W 0603", Failure Rate=-, Features="Moisture Resistant", Height - Seated (Max)="0.022\" (0.55mm)", Packaging="Cut Tape (CT)", Part Status=Active, Pricing 1="1=0.16, 10=0.022, 100=0.0089, 1000=0.00402, 2500=0.00349 (CAD)", RoHS="RoHS Compliant", Size / Dimension="0.063\" L x 0.031\" W (1.60mm x 0.80mm)", Source="Schematic Diagrams.SchLib", Stock 1=2336711
R3 R5 R17: library part CMP-009-00024-4, "Chip Resistor, 100 KOhm, +/- 1%, 0.125 W, -55 to 155 degC, 0805 (2012 Metric)", Case/Package=0805, Max Operating Temperature=155°C, Min Operating Temperature=-55°C, Power=125mW, Tolerance=1%, Voltage Rating=150V, Mounting Technology=SM, Pins=2, RoHS Compliant=True
R4: library part CMP-010-0046-1, "470 kOhms ±0.1% 0.25W, 1/4W Chip Resistor 1206 (3216 Metric) Anti-Sulfur, Automotive AEC-Q200 Thin Film", Case Code (Metric)=3216, Case/Package=1206, Manufacturer=Susumu, Manufacturer Part Number=RG3216P-4703-B-T1, Max Operating Temperature=155°C, Max Power Dissipation=250mW, Min Operating Temperature=-55°C, Package Quantity=1, Power Rating=125mW, Temperature Coefficient=25ppm/°C, Tolerance=0.1%, Voltage Rating=150V, Voltage Rating (DC)=200V, ComponentLink1Description=https://datasheet.ciiva.com/2490/rg-rm-rgh-datasheet-2490488.pdf, ComponentLink1URL=https://datasheet.ciiva.com/2490/rg-rm-rgh-datasheet-2490488.pdf, ComponentLink2Description=https://datasheet.ciiva.com/2490/rg-rm-rgh-datasheet-2490489.pdf, ComponentLink2URL=https://datasheet.ciiva.com/2490/rg-rm-rgh-datasheet-2490489.pdf, ComponentLink3Description=https://datasheet.ciiva.com/2490/rg-rm-rgh-datasheet-2490490.pdf, ComponentLink3URL=https://datasheet.ciiva.com/2490/rg-rm-rgh-datasheet-2490490.pdf, ComponentLink4Description=https://datasheet.ciiva.com/12760/rg-rm-rgh-datasheet-12760397.pdf, ComponentLink4URL=https://datasheet.ciiva.com/12760/rg-rm-rgh-datasheet-12760397.pdf, Composition="Thin Film", Design Item ID="RES SMD 470K OHM 0.1% 1/4W 1206", Height=0.02inch, Lead Free="Lead Free", Length=0.126inch, Number of Terminations=2, Packaging="Tape and Reel", Pins=2, Pricing 1="1=0.66, 10=0.474, 100=0.2462 (USD)", Source="Schematic Diagrams.SchLib", Stock 1=2986, Termination=SMD/SMT, Width=0.063inch
R6 R7: "RES SMD 1 OHM 5% 1/10W 0603", Digi-Key Part Number=RHM1.0AZCT-ND, Manufacturer 1="Rohm Semiconductor", Manufacturer Part Number 1=KTR03EZPJ1R0, Package / Case="0603 (1608 Metric)", Power (Watts)="0.1W, 1/10W", Resistance="1 Ohms", Supplier Device Package=0603, Tolerance=±5%, Detailed Description="1 Ohms ±5% 0.1W, 1/10W Chip Resistor 0603 (1608 Metric) Automotive AEC-Q200, High Voltage Thick Film", Supplier 1=Digi-Key, Supplier Part Number 1=RHM1.0AZCT-ND
R8 R18: "330 Ohms ±1% 0.1W, 1/10W Chip Resistor 0603 (1608 Metric) Automotive AEC-Q200, Moisture Resistant Thick Film", Manufacturer="TE Connectivity", Manufacturer Part Number=1-2176339-9, Power=1/10W, Resistance=330, Supplier Part Number 1=A129682TR-ND, Stock 1=0, Supplier 1=Digi-Key
R9: "RES SMD 10K OHM 1% 1/10W 0603", Manufacturer 1=Yageo, Manufacturer Part Number 1=RC0603FR-0710KL, Operating Temperature="-55°C ~ 155°C", Package / Case="0603 (1608 Metric)", Power=1/10W, Resistance=10k, Supplier Device Package=0603, Supplier Part Number 1=311-10.0KHRCT-ND, Temperature Coefficient=±100ppm/°C, Tolerance=±1%, ComponentLink1Description=http://www.yageo.com/documents/recent/PYu-RC_Group_51_RoHS_L_7.pdf, ComponentLink1URL=http://www.yageo.com/documents/recent/PYu-RC_Group_51_RoHS_L_7.pdf, Composition="Thick Film", Failure Rate=-, Height - Seated (Max)="0.022\" (0.55mm)", Packaging="Cut Tape (CT)", Part Status=Active, Size / Dimension="0.063\" L x 0.031\" W (1.60mm x 0.80mm)", Supplier 1=Digi-Key
R10: "54.9k Ohm ±1% 0.1W, 1/10W Chip Resistor 0603 (1608 Metric) Automotive AEC-Q200 Thick Film", Manufacturer="Panasonic Electronic Components", Manufacturer Part Number=ERJ-3EKF5492V, Operating Temperature="-55°C ~ 155°C", Package / Case="0603 (1608 Metric)", Power (Watts)=1/10W, Resistance (Ohms)=54.9k, Supplier Device Package=0603, Supplier Part Number 1=P54.9KHCT-ND, Temperature Coefficient=±100ppm/°C, Tolerance=±1%, Category=Resistors, ComponentLink1Description=https://industrial.panasonic.com/cdbs/www-data/pdf/RDA0000/AOA0000C298.pdf, ComponentLink1URL=https://industrial.panasonic.com/cdbs/www-data/pdf/RDA0000/AOA0000C298.pdf, Composition="Thick Film", Failure Rate=-, Features="Automotive AEC-Q200", Height - Seated (Max)="0.022\" (0.55mm)", Packaging="Cut Tape (CT)", Part Status=Active, Pricing 1="1=0.16, 10=0.031, 100=0.0127, 1000=0.00567, 2500=0.00492 (CAD)", RoHS="RoHS Compliant", Size / Dimension="0.063\" L x 0.031\" W (1.60mm x 0.80mm)", Stock 1=74038, Supplier 1=Digi-Key
R11: library part "RES 5.6K OHM 5% 1/10W 0603", "5.6 kOhms ±5% 0.1W, 1/10W Chip Resistor 0603 (1608 Metric) Moisture Resistant Thick Film", Manufacturer 1=Yageo, Manufacturer Part Number 1=RC0603JR-075K6L, Resistance="5.6 kOhms", Supplier Device Package=0603, Supplier Part Number 1=311-5.6KGRCT-ND, Tolerance=±5%, Supplier 1=Digi-Key
R12: "RES SMD 0.0 OHM JUMPER 1/4W 0603", Manufacturer 1="Vishay Dale", Manufacturer Part Number 1=CRCW06030000Z0EAHP, Operating Temperature="-55°C ~ 155°C", Package / Case="0603 (1608 Metric)", Power (Watts)=1/4W, Resistance=0.0, Supplier Device Package=0603, Supplier Part Number 1=541-0.0SBCT-ND, ComponentLink1Description=http://www.vishay.com/docs/20043/crcwhpe3.pdf, ComponentLink1URL=http://www.vishay.com/docs/20043/crcwhpe3.pdf, Composition="Thick Film", Failure Rate=-, Height - Seated (Max)="0.022\" (0.55mm)", Packaging="Cut Tape (CT)", Part Status=Active, Size / Dimension="0.063\" L x 0.033\" W (1.60mm x 0.85mm)", Supplier 1=Digi-Key
R13 R14: library part CMP-009-00018-4, "Chip Resistor, 10 KOhm, +/- 1%, 125 mW, -55 to 155 degC, 0805 (2012 Metric)", Case/Package=0805, Max Operating Temperature=155°C, Min Operating Temperature=-55°C, Power=125mW, Tolerance=1%, Voltage Rating=150V, Mounting Technology=SM, Pins=2, RoHS Compliant=True
R15: library part CMP-009-00178-1, "YAGEO         RC0603FR-07100RL            RES, THICK FILM, 100R, 1%, 0.1W, 0603, REEL", Case Code (Imperial)=0603, Case Code (Metric)=1608, Max Operating Temperature=155°C, Min Operating Temperature=-55°C, Power Rating=100mW, Resistance=100R, Temperature Coefficient=100ppm/°C, Tolerance=1%, Voltage Rating=50V, Case/Package=0603, Composition="Thick Film", Depth=0.8mm, Height=0.45mm, Lead Free="Lead Free", Length=1.6mm, Military Standard=Not, Number of Pins=2, Packaging="Tape and Reel", REACH SVHC=Unknown, Termination=SMD/SMT, Voltage Rating (DC)=50V, Width=0.8mm
R16: library part CMP-010-0006-1, "1k Ohm ±5% 0.1W, 1/10W Chip Resistor 0603 (1608 Metric)", Manufacturer=Yageo, Manufacturer Part Number=RC0603JR-071KL, Operating Temperature="-55°C ~ 155°C", Package / Case="0603 (1608 Metric)", Power (Watts)="0.1W, 1/10W", Resistance (Ohms)=1k, Supplier Device Package=0603, Temperature Coefficient=±100ppm/°C, Tolerance=5%, ComponentLink1Description=http://www.yageo.com/documents/recent/PYu-RC_Group_51_RoHS_L_7.pdf, ComponentLink1URL=http://www.yageo.com/documents/recent/PYu-RC_Group_51_RoHS_L_7.pdf, Composition="Thick Film", Design Item ID="RES 1K OHM 5% 1/10W 0603", Failure Rate=-, Features="Moisture Resistant", Height - Seated (Max)="0.022\" (0.55mm)", Packaging="Cut Tape (CT)", Part Status=Active, Pricing 1="1=0.15, 10=0.017, 100=0.0071, 1000=0.0032, 2500=0.00278 (CAD)", RoHS="RoHS Compliant", Size / Dimension="0.063\" L x 0.031\" W (1.60mm x 0.80mm)", Source="Schematic Diagrams.SchLib", Stock 1=4415240
R19: "4.7k Ohm ±1% 0.1W, 1/10W Chip Resistor 0603 (1608 Metric) Moisture Resistant Thick Film", Manufacturer 1=Yageo, Manufacturer Part Number 1=RC0603FR-074K7L, Operating Temperature="-55°C ~ 155°C", Package / Case="0603 (1608 Metric)", Power (Watts)=1/10W, Resistance (Ohms)=4.7k, Supplier Device Package=0603, Supplier Part Number 1=311-4.70KHRCT-ND, Temperature Coefficient=±100ppm/°C, Tolerance=±1%, Category=Resistors, ComponentLink1Description=http://www.yageo.com/documents/recent/PYu-RC_Group_51_RoHS_L_7.pdf, ComponentLink1URL=http://www.yageo.com/documents/recent/PYu-RC_Group_51_RoHS_L_7.pdf, Composition="Thick Film", Description 1="RES SMD 4.7K OHM 1% 1/10W 0603", Failure Rate=-, Features="Moisture Resistant", Height - Seated (Max)="0.022\" (0.55mm)", Packaging="Cut Tape (CT)", Part Status=Active, Pricing 1="1=0.16, 10=0.022, 100=0.0089, 1000=0.00402, 2500=0.00349 (CAD)", RoHS="RoHS Compliant", Size / Dimension="0.063\" L x 0.031\" W (1.60mm x 0.80mm)", Stock 1=3487566, Supplier 1=Digi-Key
RT2: library part "NTC THERMISTOR 10K 1% BEAD", "NTC Thermistor 10k Bead", B Value Tolerance=±1%, Manufacturer="Murata Electronics North America", Manufacturer Part Number=NXRT15XH103FA1B030, Operating Temperature="-40°C ~ 125°C", Package / Case=Bead, Resistance in Ohms @ 25°C=10k, Supplier Part Number 1=490-8601-ND, B0/50=-, B25/50=3380K, B25/75=-, B25/85=3434K, B25/100=3455K, Category="Sensors, Transducers", ComponentLink1Description=https://www.murata.com/~/media/webrenewal/support/library/catalog/products/thermistor/ntc/r44e.ashx, ComponentLink1URL=https://www.murata.com/~/media/webrenewal/support/library/catalog/products/thermistor/ntc/r44e.ashx, Length - Lead Wire=-, Mounting Type="Through Hole", Packaging=Bulk, Part Status=Active, Pricing 1="1=0.96, 5=0.91, 10=0.792, 25=0.696, 50=0.5784, 100=0.4925, 500=0.42834, 1000=0.3748, 5000=0.33197 (CAD)", Resistance Tolerance=±1%, RoHS="RoHS Compliant", Stock 1=25017, Supplier 1=Digi-Key
TP1 TP2 TP3 TP4 TP5 TP6 TP7 TP8 TP9: library part CMP-003-0176-1, Design Item ID="Thru Test Point", Source="Schematic Diagrams.SchLib"
U1: library part CMP-015-00008-1, "Transistor Output Optocouplers Dual 1 Form-A relay 4-Pin SOP", Case/Package=SOP, Collector Emitter Voltage (VCEO)=300mV, Max Operating Temperature=85°C, Min Operating Temperature=-40°C, Package Quantity=100, Lead Free="Lead Free", Mount="Surface Mount", Number of Channels=1, Number of Pins=4, Packaging=Rail/Tube
U2: "DC DC CONVERTER 15V 240W", Current - Output (Max)=16A, Manufacturer 1="Vicor Corporation", Manufacturer Part Number 1=DCM3623TA5N17B4T70, Operating Temperature="-40°C ~ 105°C", Package / Case="9-DIP Module", Power=240W, Supplier Part Number 1=1470-2950-1-ND, Voltage - Input (Max)=43V, Voltage - Input (Min)=154V, Voltage - Output 1=15V, Voltage - Output 2=-, ComponentLink1Description=http://www.vicorpower.com/documents/datasheets/DCM3623xA5N17B4y7z_ds.pdf, ComponentLink1URL=http://www.vicorpower.com/documents/datasheets/DCM3623xA5N17B4y7z_ds.pdf, Efficiency=92.1%, Mounting Type="Surface Mount", Number of Outputs=1, Packaging="Cut Tape (CT)", Part Status=Active, Size / Dimension="1.52\" L x 0.90\" W x 0.28\" H (38.72mm x 22.8mm x 7.2mm)", Supplier 1=Digi-Key, Type="DCDC Converter Module", Voltage - Output 3=-

## Free pads (board coordinates)
  round 2.7 hole 2.7: ""(-193.53,3) ""(-193.53,64.008) ""(-140,3) ""(-140,64.008) ""(-30,3) ""(-30,64.008) ""(-3,3) ""(-3,64.008)

## Via types
v1: diameter 2.54, hole 1.27, Top Layer to Bottom Layer, tented both sides, 119 vias
v2: diameter 1.27, hole 0.711, Top Layer to Bottom Layer, tented both sides, 6 vias
v3: diameter 1.524, hole 0.762, Top Layer to Bottom Layer, tented both sides, 2 vias

## Nets (pads, with @x,y where several pads share a name; then routed paths per layer and width w, separated by ;. In a path a pad name is that pad's centre, name@x,y a point inside that pad or via, vN(x,y) a via of type N, cw(c..) or ccw(c..) an arc to the next point about the centre after c; other vN are vias at no path point)
BULK_CAP_NEG: C1.2 C11.2 C12.2 C14.2 C18.2 C20.2 C21.2 C27.2 CMC1.4 D2.1 LED3.2 Q1.4 Q2.2 R4.2 R10.2 R11.1 R14.1 R18.2 U2.E1 | length 24.2
  Top Layer w0.762: Q2.2 -165.34,6.365 -163.877,4.902 v2(-156.464,4.902) ; -157.226,8.872 -157.226,8.24 -156.464,7.478 v2(-156.464,7.442)
  Top Layer w1.27: R14.1 -165.605,6.477 -165.54,6.412 Q2.2 ; D2.1 -159.69,8.128 -157.97,8.128 -157.226,8.872 -157.226,9.853 ; C1.2@-157.251,10.86 -157.226,10.835 -157.226,9.853 ; R4.2 -154.988,9.775 -155.067,9.853 -157.226,9.853
  Bottom Layer w0.762: v2(-156.464,4.902) v2(-156.464,7.442)
  other v1: -147.825,6.202 -132.585,6.202 -127.505,6.202 -122.425,6.202 -109.725,11.282 -104.645,11.282 -94.485,11.282 -89.405,11.282 -84.325,11.282 -107.185,16.362 -86.865,16.362 -81.785,16.362 -140.205,21.442 -135.125,21.442 -124.965,21.442 -104.645,21.442 -137.665,26.522 -107.185,26.522 -102.105,26.522 -86.865,26.522 -81.785,26.522 -135.125,31.602 -130.045,31.602 -124.965,31.602 -89.405,31.602 -84.325,31.602 -127.619,36.911 -132.877,36.987 -135.125,41.762 -124.965,41.762 -114.805,41.762 -89.405,41.762 -84.325,41.762 -147.825,46.842 -142.745,46.842 -137.665,46.842 -127.505,46.842 -122.425,46.842 -102.105,57.002 -97.025,57.002 -91.945,57.002 -86.865,57.002 -81.785,57.002 -155.445,62.082 -150.365,62.082 -145.285,62.082 -130.045,62.082 -124.965,62.082 -99.565,62.082 -94.485,62.082 -89.405,62.082 -84.325,62.082
BULK_CAP_POS: C7.1 C8.1 C11.1 C12.1 CMC1.2 D1.1 L2.1 R1.2 R2.1 R6.1 TP2.TH_TP | length 35.5
  Top Layer w1.397: D1.1 -164.659,15.707 -163.291,17.075 -160.472,17.075 R2.1 -160.299,19.787 -157.531,22.555 -149.616,22.555 ; CMC1.2 -149.882,29.532 -149.882,32.148 -147.387,34.643 C8.1 -143.188,34.645 -140.985,34.645 -140.983,34.646 C7.1
CHOKE_NEG: C3.2 C4.2 CMC1.3 P3.2
CHOKE_POS: C2.1 C16.1 CMC1.1 F1.2
DCDC_FAULT: P6.4 R16.1 U1.3 | length 40.2
  Top Layer w0.762: U1.3 -53.543,2.108 -51.467,4.185 -48.514,7.137 R16.1@-45.035,7.137 ; R16.1@-45.034,7.137 -44.99,7.181 -44.457,7.181 -39.646,11.992 -39.646,12.057 P6.4
DCDC_TEMP: P6.3 RT2.2 | length 6.5
  Top Layer w0.762: P6.3 -33.724,9.972 RT2.2
EMI_GND: C9.2 C10.2 C18.1 C19.1 P1.1 | length 65.4
  Bottom Layer w1.27: C18.1 -106.333,35.158 ; C9.2 -106.333,35.158 ; C10.2 -50.583,34.908 ; C19.1 -50.583,34.908 ; -106.333,35.158 -103.583,35.158 -99.333,39.408 -94.333,39.408 -89.833,34.908 -50.583,34.908
GND: C13.2 C15.2 C19.2 C22.2 LED1.2 P2.2 R16.2 U2.B'2 U2.D'2
  other v1: -69.085,11.282 -64.005,11.282 -58.925,11.282 -53.845,11.282 -28.445,11.282 -23.365,11.282 -3.045,11.282 -51.305,16.362 -46.225,16.362 -30.985,16.362 -25.905,16.362 -43.685,21.442 -38.605,21.442 -33.525,21.442 -28.445,21.442 -23.365,21.442 -3.045,21.442 -71.625,26.522 -66.545,26.522 -69.085,31.602 -13.205,31.602 -30.985,36.682 -25.905,36.682 -20.825,36.682 -69.085,41.762 -28.445,41.762 -23.365,41.762 -41.145,46.842 -36.065,46.842 -30.985,46.842 -25.905,46.842 -20.825,46.842 -53.845,51.922 -48.765,51.922 -43.685,51.922 -38.605,51.922 -33.525,51.922 -28.445,51.922 -23.365,51.922 -18.285,51.922 -13.205,51.922 -8.125,51.922 -3.045,51.922 -71.625,57.002 -66.545,57.002 -61.465,57.002 -56.385,57.002 -51.305,57.002 -46.225,57.002 -41.145,57.002 -36.065,57.002 -30.985,57.002 -25.905,57.002 -20.825,57.002 -15.745,57.002 -10.665,57.002 -5.585,57.002 -69.085,62.082 -64.005,62.082 -58.925,62.082 -53.845,62.082 -48.765,62.082 -43.685,62.082 -38.605,62.082 -23.365,62.082 -18.285,62.082 -13.205,62.082
  other v3: -43.866,11.151 -49.555,14.63
HV_POS: NTC2.1 NTC3.1 P3.1
LDO_3V: C23.1 P6.1 R15.2 RT2.1 | length 30.1
  Top Layer w0.762: R15.2 -46.914,11.608 -42.824,15.697 -38.109,15.697 -37.662,15.251 -37.662,10.911 P6.1 -36.297,9.407 -36.297,7.763 ; C23.1 -37.054,5.363 -36.297,6.12 -36.297,7.472 -36.297,7.763 ; RT2.1 -36.005,7.472 -36.297,7.763
NetC1_1: C1.1 D2.2 R2.2 R3.2 TP7.TH_TP | length 10.8
  Top Layer w1.397: R2.2@-160.325,15.423 -160.325,12.128 -160.134,11.938 D2.2 ; D2.2@-159.944,12.675 C1.1@-157.556,12.675 ; TP7.TH_TP -159.107,13.867 -157.2,13.867 ; C1.1@-157.173,12.448 -157.173,13.894 -157.2,13.867 ; R3.2 -157.153,15.119 -157.176,15.095 -157.176,15.092 -157.2,15.069 -157.2,13.867
NetC2_2: C2.2 C4.1 | length 7.2
  Top Layer w1.397: C4.1 C2.2@-175.959,28.633
NetC3_1: C3.1 C16.2 | length 1.5
  Top Layer w1.651: C3.1@-170.876,24.211 C16.2@-170.876,25.684
NetC5_1: C5.1 C9.1 L2.2 R6.2 TP3.TH_TP U2.A1 | length 62.2
  Top Layer w1.778: R6.2@-114.805,12.852 C5.1@-114.805,14.939
  Top Layer w2.54: C5.1@-114.31,15.061 -117.728,15.061 -121.539,18.872 -121.539,42.824 -117.955,46.408 C9.1 -102.833,42.908 U2.A1
NetC5_2: C5.2 C14.1
NetC7_2: C7.2 C27.1 | length 6.1
  Top Layer w1.397: C27.1@-141.178,39.884 -138.314,37.02 -138.314,35.007 C7.2@-138.313,35.006
NetC8_2: C8.2 C20.1 | length 2.5
  Top Layer w1.397: C20.1@-145.62,37.236 -143.959,37.236 -143.803,37.392 -143.191,37.392 C8.2
NetC10_1: C10.1 C15.1 L1.1 R7.1 TP4.TH_TP U2.A'2 U2.C'2
NetC13_1: C13.1 C22.1 L1.2 P2.1 R7.2 R19.1 TP5.TH_TP